# Altium PCB SW_SWITCHED_LPF_BANK.PcbDoc (part 2 of 2)
Units mm, origin at the board's own origin, x right, y up, seen from the top; angles counter-clockwise.
Board outline 151 x 125 mm, 2 copper layers (Top Layer, Bottom Layer), stack 1.576 mm thick; 115 components, 47 nets, 280 pads, 1853 vias.
Unrouted connection lines stored in the file: 42.
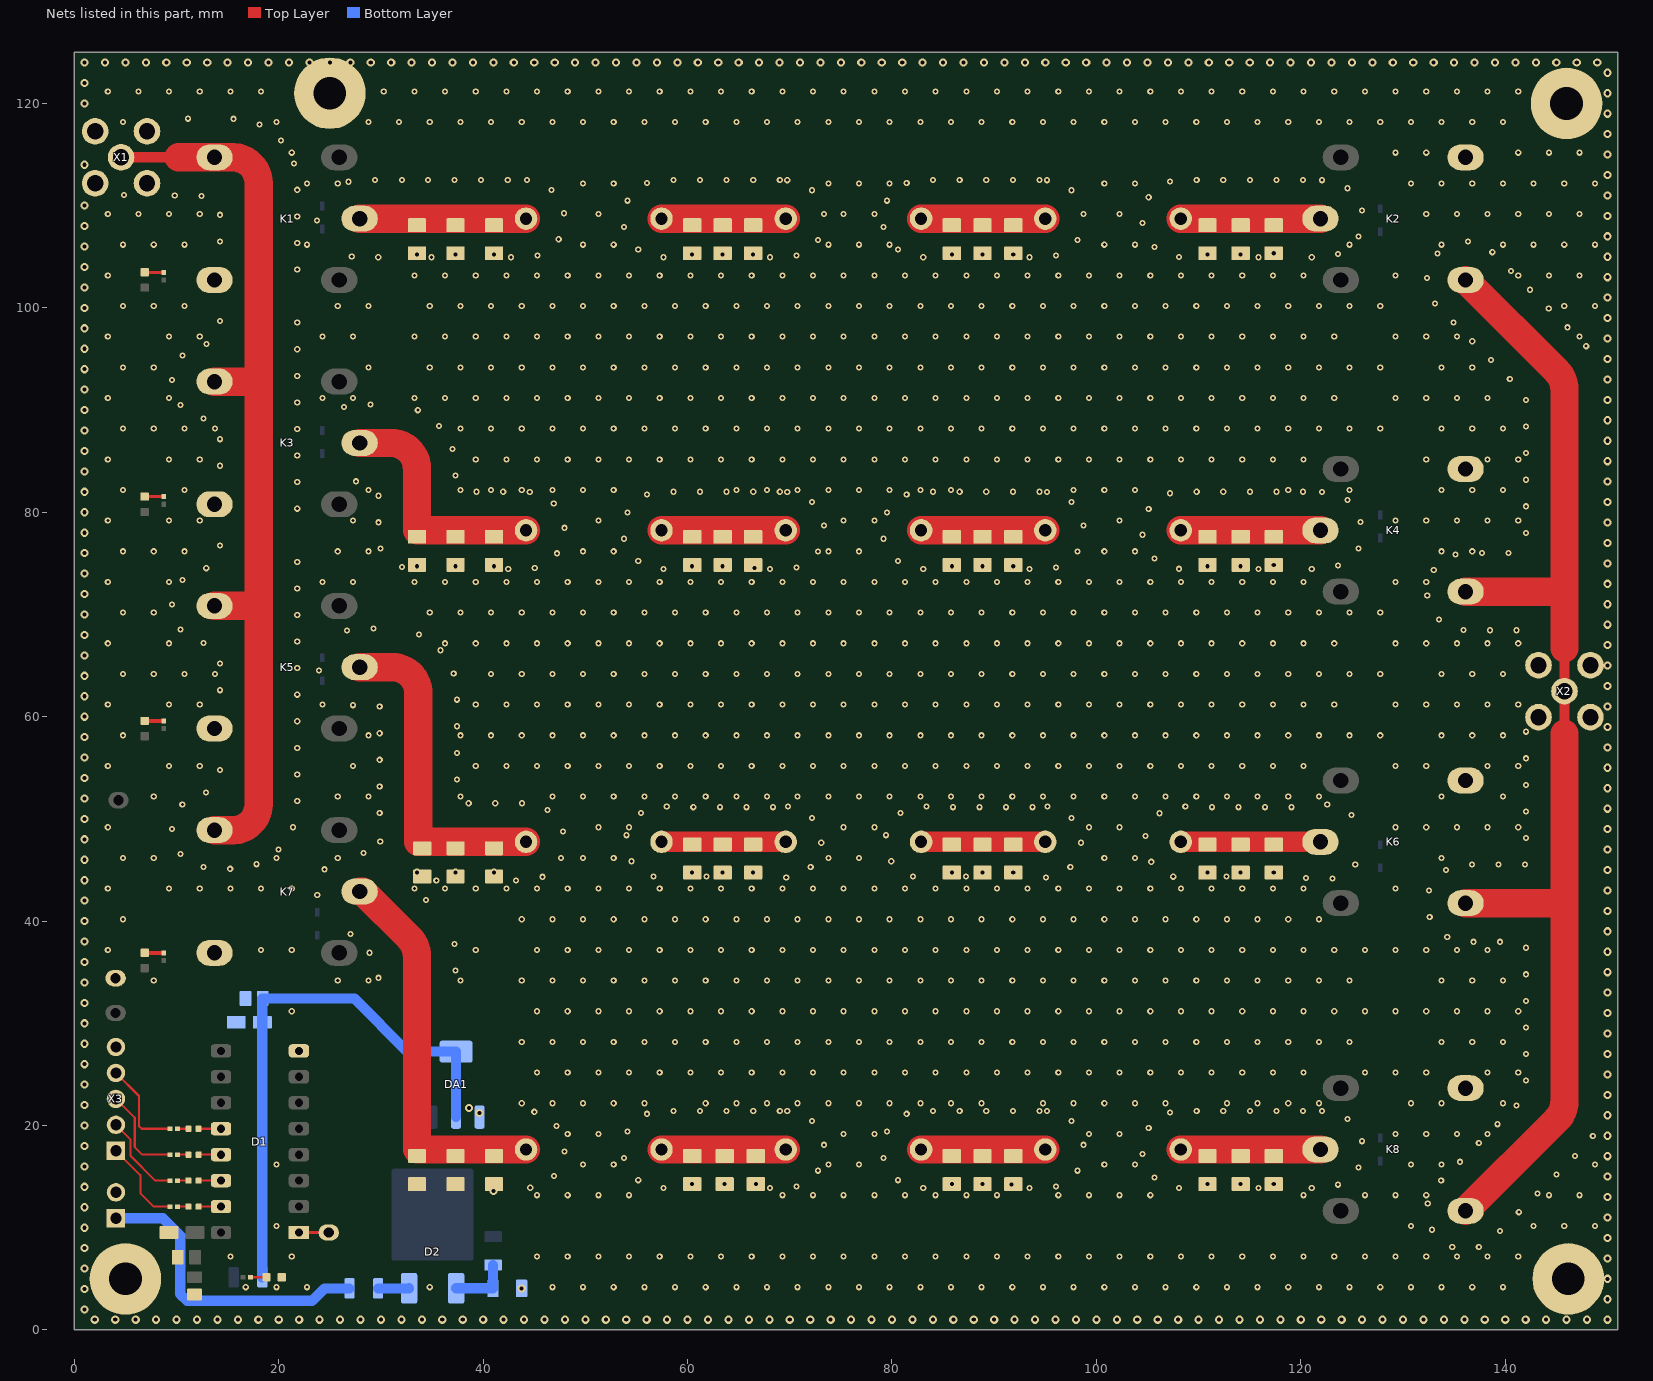
[diagram p2: the nets of this part, all layers, seen from the top]

## Via types
v1: diameter 0.6, hole 0.3, Top Layer to Bottom Layer, tented both sides, 1534 vias
v2: diameter 0.8, hole 0.4, Top Layer to Bottom Layer, tented both sides, 319 vias

## Nets (pads, with @x,y where several pads share a name; then routed paths per layer and width w, separated by ;. In a path a pad name is that pad's centre, name@x,y a point inside that pad or via, vN(x,y) a via of type N, cw(c..) or ccw(c..) an arc to the next point about the centre after c; other vN are vias at no path point) (continued)
GND: C1.2 C2.2 C3.2 C4.2 C5.2 C6.2 C7.2 C8.2 C9.2 C10.2 C11.2 C12.2 C13.2 C14.2 C15.2 C16.2 C17.2 C18.2 C19.2 C20.2 C21.2 C22.2 C23.2 C24.2 C25.2 C26.2 C27.2 C28.2 C29.2 C30.2 C31.2 C32.2 C33.2 C34.2 C35.2 C36.2 C37.2 C38.2 C39.2 C40.2 C41.2 C42.2 C43.2 C44.2 C45.2 C46.2 C47.2 C48.2 C49.2 C50.2 C51.2 C52.2 C53.2 C54.2 D1.8 DA1.1 FP6.1 HG5.CA K1.5 K2.5 K3.5 K4.5 K5.5 K6.5 K7.5 K8.5 pad.8 R6.2 X1.2 X2.2 X3.5 X4.2
  other v1: 16.772,4.18 19.772,4.18 22.772,4.18 34.772,4.18 46.772,4.18 49.772,4.18 52.772,4.18 55.772,4.18 58.772,4.18 61.772,4.18 64.772,4.18 67.772,4.18 70.772,4.18 73.772,4.18 76.772,4.18 79.772,4.18 82.772,4.18 85.772,4.18 88.772,4.18 91.772,4.18 94.772,4.18 97.772,4.18 100.772,4.18 103.772,4.18 106.772,4.18 109.772,4.18 112.772,4.18 115.772,4.18 118.772,4.18 121.772,4.18 124.772,4.18 127.772,4.18 130.772,4.18 133.772,4.18 136.772,4.18 139.772,4.18 15.272,7.18 21.272,7.18 45.272,7.18 48.272,7.18 51.272,7.18 54.272,7.18 57.272,7.18 60.272,7.18 63.272,7.18 66.272,7.18 69.272,7.18 72.272,7.18 75.272,7.18 78.272,7.18 81.272,7.18 84.272,7.18 87.272,7.18 90.272,7.18 93.272,7.18 96.272,7.18 99.272,7.18 102.272,7.18 105.272,7.18 108.272,7.18 111.272,7.18 114.272,7.18 117.272,7.18 120.272,7.18 123.272,7.18 126.272,7.18 129.272,7.18 132.272,7.18 135.272,7.18 138.272,7.18 141.272,7.18 137.415,8.112 134.815,8.117 139.49,9.679 132.835,9.803 19.772,10.18 130.772,10.18 142.772,10.18 145.772,10.18 148.772,10.18 141.328,11.518 132.42,12.37 45.272,13.18 48.272,13.18 51.272,13.18 54.272,13.18 69.272,13.18 72.272,13.18 75.272,13.18 78.272,13.18 81.272,13.18 84.272,13.18 87.272,13.18 90.272,13.18 96.272,13.18 99.272,13.18 102.272,13.18 105.272,13.18 120.272,13.18 126.272,13.18 129.272,13.18 132.272,13.18 144.272,13.18 147.272,13.18 143.167,13.356 57.658,13.875 68.058,13.875 83.058,13.875 93.458,13.875 115.869,13.875 121.069,13.875 108.069,13.891 44.61,13.908 70.653,14.032 96.053,14.032 123.647,14.208 133.736,14.612 55.176,14.649 80.576,14.649 105.671,14.895 46.94,15.063 145.005,15.195 72.743,15.579 98.143,15.579 125.63,15.89 19.772,16.18 49.772,16.18 52.772,16.18 73.772,16.18 76.772,16.18 100.772,16.18 103.772,16.18 130.772,16.18 133.772,16.18 148.772,16.18 135.574,16.451 53.763,16.831 79.163,16.831 146.844,17.033 104.506,17.22 47.962,17.453 73.335,18.111 98.735,18.111 137.413,18.289 125.997,18.464 148.568,18.979 48.272,19.18 51.272,19.18 75.272,19.18 78.272,19.18 99.272,19.18 102.272,19.18 129.272,19.18 132.272,19.18 135.272,19.18 138.272,19.18 54.105,19.408 79.505,19.408 105.116,19.748 47.192,19.936 139.251,20.127 72.156,20.429 97.556,20.429 124.552,20.626 56.039,21.146 81.439,21.146 107.216,21.28 45.003,21.34 69.751,21.416 95.151,21.416 122.075,21.416 58.623,21.431 61.223,21.431 63.823,21.431 66.423,21.431 69.023,21.431 84.023,21.431 86.623,21.431 89.223,21.431 91.823,21.431 94.423,21.431 109.812,21.431 112.412,21.431 115.012,21.431 117.612,21.431 120.212,21.431 141.089,21.966 43.772,22.18 46.772,22.18 49.772,22.18 52.772,22.18 55.772,22.18 61.772,22.18 64.772,22.18 67.772,22.18 70.772,22.18 73.772,22.18 76.772,22.18 79.772,22.18 82.772,22.18 85.772,22.18 88.772,22.18 94.772,22.18 97.772,22.18 100.772,22.18 103.772,22.18 106.772,22.18 112.772,22.18 115.772,22.18 118.772,22.18 121.772,22.18 130.772,22.18 133.772,22.18 139.772,22.18 142.018,24.395 45.272,25.18 48.272,25.18 51.272,25.18 54.272,25.18 57.272,25.18 60.272,25.18 63.272,25.18 66.272,25.18 69.272,25.18 72.272,25.18 75.272,25.18 78.272,25.18 81.272,25.18 84.272,25.18 87.272,25.18 90.272,25.18 93.272,25.18 96.272,25.18 99.272,25.18 102.272,25.18 105.272,25.18 108.272,25.18 111.272,25.18 114.272,25.18 117.272,25.18 120.272,25.18 126.272,25.18 129.272,25.18 132.272,25.18 138.272,25.18 141.272,25.18 142.018,26.995 43.772,28.18 46.772,28.18 49.772,28.18 52.772,28.18 55.772,28.18 58.772,28.18 61.772,28.18 64.772,28.18 67.772,28.18 70.772,28.18 73.772,28.18 76.772,28.18 79.772,28.18 82.772,28.18 85.772,28.18 88.772,28.18 91.772,28.18 94.772,28.18 97.772,28.18 100.772,28.18 103.772,28.18 106.772,28.18 109.772,28.18 112.772,28.18 115.772,28.18 118.772,28.18 121.772,28.18 124.772,28.18 133.772,28.18 136.772,28.18 139.772,28.18 142.018,29.595 21.272,31.18 45.272,31.18 48.272,31.18 51.272,31.18 54.272,31.18 57.272,31.18 60.272,31.18 63.272,31.18 66.272,31.18 69.272,31.18 72.272,31.18 75.272,31.18 78.272,31.18 81.272,31.18 84.272,31.18 87.272,31.18 90.272,31.18 93.272,31.18 96.272,31.18 99.272,31.18 102.272,31.18 105.272,31.18 108.272,31.18 111.272,31.18 114.272,31.18 117.272,31.18 120.272,31.18 123.272,31.18 126.272,31.18 129.272,31.18 132.272,31.18 135.272,31.18 138.272,31.18 141.272,31.18 142.018,32.195 7.772,34.18 25.772,34.18 28.772,34.18 37.772,34.18 43.772,34.18 46.772,34.18 49.772,34.18 52.772,34.18 55.772,34.18 58.772,34.18 61.772,34.18 64.772,34.18 67.772,34.18 70.772,34.18 73.772,34.18 76.772,34.18 79.772,34.18 82.772,34.18 85.772,34.18 88.772,34.18 91.772,34.18 94.772,34.18 97.772,34.18 100.772,34.18 103.772,34.18 106.772,34.18 109.772,34.18 112.772,34.18 115.772,34.18 118.772,34.18 121.772,34.18 124.772,34.18 133.772,34.18 136.772,34.18 139.772,34.18 29.75,34.452 142.018,34.795 37.306,35.152 28.876,36.901 3.272,37.18 18.272,37.18 21.272,37.18 39.272,37.18 45.272,37.18 48.272,37.18 51.272,37.18 54.272,37.18 57.272,37.18 60.272,37.18 63.272,37.18 66.272,37.18 69.272,37.18 72.272,37.18 75.272,37.18 78.272,37.18 81.272,37.18 84.272,37.18 87.272,37.18 90.272,37.18 93.272,37.18 96.272,37.18 99.272,37.18 102.272,37.18 105.272,37.18 108.272,37.18 111.272,37.18 114.272,37.18 117.272,37.18 120.272,37.18 123.272,37.18 126.272,37.18 129.272,37.18 132.272,37.18 135.272,37.18 138.272,37.18 142.018,37.395 37.183,37.749 136.883,37.974 139.483,37.974 134.324,38.434 27.037,38.739 4.772,40.18 43.772,40.18 46.772,40.18 49.772,40.18 52.772,40.18 55.772,40.18 58.772,40.18 61.772,40.18 64.772,40.18 67.772,40.18 70.772,40.18 73.772,40.18 76.772,40.18 79.772,40.18 82.772,40.18 85.772,40.18 88.772,40.18 91.772,40.18 94.772,40.18 97.772,40.18 100.772,40.18 103.772,40.18 106.772,40.18 109.772,40.18 112.772,40.18 115.772,40.18 118.772,40.18 121.772,40.18 132.608,40.388 34.408,42.055 23.768,42.566 132.559,42.987 3.272,43.18 9.272,43.18 12.272,43.18 15.272,43.18 18.272,43.18 21.272,43.18 33.272,43.18 36.272,43.18 39.272,43.18 42.272,43.18 45.272,43.18 48.272,43.18 51.272,43.18 54.272,43.18 57.272,43.18 60.272,43.18 63.272,43.18 66.272,43.18 69.272,43.18 72.272,43.18 75.272,43.18 78.272,43.18 81.272,43.18 84.272,43.18 87.272,43.18 90.272,43.18 93.272,43.18 96.272,43.18 99.272,43.18 102.272,43.18 105.272,43.18 108.272,43.18 111.272,43.18 114.272,43.18 117.272,43.18 120.272,43.18 129.272,43.18 35.413,43.974 43.213,43.974 123.111,44.163 120.512,44.211 69.651,44.269 95.051,44.269 45.788,44.335 56.652,44.358 82.052,44.358 107.516,44.343 61.852,44.362 87.252,44.362 112.716,44.362 134.206,44.999 24.473,45.068 15.249,45.117 12.654,45.276 72.047,45.279 97.447,45.279 125.324,45.528 136.751,45.53 139.351,45.53 141.951,45.53 17.809,45.568 105.364,45.802 54.525,45.852 79.925,45.852 4.772,46.18 7.772,46.18 19.772,46.18 25.772,46.18 47.621,46.179 49.772,46.18 52.772,46.18 73.772,46.18 76.772,46.18 100.772,46.18 103.772,46.18 133.772,46.18 10.395,46.563 28.303,46.666 19.98,46.999 73.08,47.665 98.48,47.665 29.927,47.802 142.018,48.13 104.814,48.343 54.028,48.405 79.428,48.405 47.826,48.771 9.552,49.023 3.272,49.18 21.388,49.185 51.272,49.18 54.272,49.18 75.272,49.18 78.272,49.18 99.272,49.18 102.272,49.18 129.272,49.18 132.272,49.18 135.272,49.18 138.272,49.18 141.272,49.18 72.174,50.103 97.574,50.103 124.973,50.375 106.182,50.555 29.877,50.58 55.432,50.593 80.832,50.593 142.018,50.73 46.302,50.877 60.56,51.142 63.16,51.142 65.76,51.142 68.36,51.142 85.96,51.142 88.56,51.142 91.16,51.142 93.76,51.142 111.298,51.142 113.898,51.142 116.498,51.142 119.098,51.142 57.961,51.196 83.361,51.196 108.699,51.204 69.829,51.225 95.229,51.225 10.562,51.418 122.583,51.399 38.585,51.53 41.185,51.53 43.785,51.53 21.812,51.75 7.772,52.18 25.772,52.18 28.772,52.18 37.772,52.18 46.772,52.18 49.772,52.18 52.772,52.18 55.772,52.18 58.772,52.18 61.772,52.18 64.772,52.18 67.772,52.18 70.772,52.18 73.772,52.18 76.772,52.18 79.772,52.18 82.772,52.18 85.772,52.18 88.772,52.18 91.772,52.18 94.772,52.18 97.772,52.18 100.772,52.18 103.772,52.18 106.772,52.18 109.772,52.18 112.772,52.18 115.772,52.18 118.772,52.18 121.772,52.18 133.772,52.18 139.772,52.18 12.888,52.58 29.877,53.18 142.018,53.33 37.433,53.861 21.812,54.35 14.256,54.791 3.272,55.18 9.272,55.18 12.272,55.18 27.272,55.18 39.272,55.18 42.272,55.18 45.272,55.18 48.272,55.18 51.272,55.18 54.272,55.18 57.272,55.18 60.272,55.18 63.272,55.18 66.272,55.18 69.272,55.18 72.272,55.18 75.272,55.18 78.272,55.18 81.272,55.18 84.272,55.18 87.272,55.18 90.272,55.18 93.272,55.18 96.272,55.18 99.272,55.18 102.272,55.18 105.272,55.18 108.272,55.18 111.272,55.18 114.272,55.18 117.272,55.18 120.272,55.18 129.272,55.18 132.272,55.18 138.272,55.18 141.272,55.18 29.877,55.78 142.018,55.93 37.433,56.461 21.812,56.95 4.772,58.18 28.772,58.18 37.772,58.18 40.772,58.18 43.772,58.18 46.772,58.18 49.772,58.18 52.772,58.18 55.772,58.18 58.772,58.18 61.772,58.18 64.772,58.18 67.772,58.18 70.772,58.18 73.772,58.18 76.772,58.18 79.772,58.18 82.772,58.18 85.772,58.18 88.772,58.18 91.772,58.18 94.772,58.18 97.772,58.18 100.772,58.18 103.772,58.18 106.772,58.18 109.772,58.18 112.772,58.18 115.772,58.18 118.772,58.18 121.772,58.18 124.772,58.18 127.772,58.18 133.772,58.18 136.772,58.18 139.772,58.18 29.877,58.38 142.034,58.53 37.433,59.061 21.812,59.55 29.877,60.98 27.281,61.124 3.272,61.18 9.272,61.18 12.272,61.18 24.272,61.18 39.272,61.18 42.272,61.18 45.272,61.18 48.272,61.18 51.272,61.18 54.272,61.18 57.272,61.18 60.272,61.18 63.272,61.18 66.272,61.18 69.272,61.18 72.272,61.18 75.272,61.18 78.272,61.18 81.272,61.18 84.272,61.18 87.272,61.18 90.272,61.18 93.272,61.18 96.272,61.18 99.272,61.18 102.272,61.18 105.272,61.18 108.272,61.18 111.272,61.18 114.272,61.18 117.272,61.18 120.272,61.18 123.272,61.18 129.272,61.18 132.272,61.18 135.272,61.18 138.272,61.18 141.272,61.18 37.433,61.661 21.812,62.15 14.256,62.591 4.772,64.18 7.772,64.18 10.772,64.18 13.772,64.18 40.772,64.18 43.772,64.18 46.772,64.18 49.772,64.18 52.772,64.18 55.772,64.18 58.772,64.18 61.772,64.18 64.772,64.18 67.772,64.18 70.772,64.18 73.772,64.18 76.772,64.18 79.772,64.18 82.772,64.18 85.772,64.18 88.772,64.18 91.772,64.18 94.772,64.18 97.772,64.18 100.772,64.18 103.772,64.18 106.772,64.18 109.772,64.18 112.772,64.18 115.772,64.18 118.772,64.18 121.772,64.18 124.772,64.18 127.772,64.18 133.772,64.18 136.772,64.18 139.772,64.18 37.116,64.242 23.946,64.514 21.812,64.75 14.256,65.191 35.823,66.498 3.272,67.18 9.272,67.18 36.272,67.18 39.272,67.18 42.272,67.18 45.272,67.18 48.272,67.18 51.272,67.18 54.272,67.18 57.272,67.18 60.272,67.18 63.272,67.18 66.272,67.18 69.272,67.18 72.272,67.18 75.272,67.18 78.272,67.18 81.272,67.18 84.272,67.18 87.272,67.18 90.272,67.18 93.272,67.18 96.272,67.18 99.272,67.18 102.272,67.18 105.272,67.18 108.272,67.18 111.272,67.18 114.272,67.18 117.272,67.18 120.272,67.18 123.272,67.18 129.272,67.18 132.272,67.18 135.272,67.18 138.272,67.18 141.272,67.18 12.635,67.224 21.812,67.35 33.731,68.042 26.665,68.418 138.5,68.454 141.1,68.454 135.9,68.471 10.383,68.523 29.258,68.618 133.514,69.504 21.812,69.95 4.772,70.18 7.772,70.18 34.772,70.18 37.772,70.18 40.772,70.18 43.772,70.18 46.772,70.18 49.772,70.18 52.772,70.18 55.772,70.18 58.772,70.18 61.772,70.18 64.772,70.18 67.772,70.18 70.772,70.18 73.772,70.18 76.772,70.18 79.772,70.18 82.772,70.18 85.772,70.18 88.772,70.18 91.772,70.18 94.772,70.18 97.772,70.18 100.772,70.18 103.772,70.18 106.772,70.18 109.772,70.18 112.772,70.18 115.772,70.18 118.772,70.18 121.772,70.18 124.772,70.18 127.772,70.18 9.551,70.987 132.373,71.84 21.812,72.55 3.272,73.18 9.272,73.18 24.272,73.18 27.272,73.18 33.272,73.18 36.272,73.18 39.272,73.18 42.272,73.18 45.272,73.18 48.272,73.18 51.272,73.18 54.272,73.18 57.272,73.18 60.272,73.18 63.272,73.18 66.272,73.18 69.272,73.18 72.272,73.18 75.272,73.18 78.272,73.18 81.272,73.18 84.272,73.18 87.272,73.18 90.272,73.18 93.272,73.18 96.272,73.18 99.272,73.18 102.272,73.18 105.272,73.18 108.272,73.18 111.272,73.18 114.272,73.18 117.272,73.18 120.272,73.18 129.272,73.18 132.272,73.18 10.576,73.376 133.009,74.361 42.451,74.454 57.658,74.454 68.058,74.454 83.058,74.454 93.458,74.454 115.869,74.454 121.069,74.454 108.069,74.47 12.908,74.526 45.049,74.555 70.653,74.611 96.053,74.611 32.058,74.641 123.647,74.787 21.812,75.15 55.176,75.228 80.576,75.228 105.671,75.474 135.128,75.868 47.22,75.986 137.724,76.01 140.324,76.01 72.743,76.158 98.143,76.158 4.772,76.18 7.772,76.18 10.772,76.18 25.772,76.18 28.772,76.18 49.772,76.18 52.772,76.18 73.772,76.18 76.772,76.18 100.772,76.18 103.772,76.18 133.772,76.18 136.772,76.18 29.943,76.456 125.63,76.469 14.256,76.75 53.763,77.41 79.163,77.41 104.506,77.799 142.018,77.983 47.956,78.48 73.335,78.69 98.735,78.69 29.75,79.017 125.844,79.043 3.272,79.18 9.272,79.18 12.272,79.18 27.272,79.18 51.272,79.18 75.272,79.18 78.272,79.18 102.272,79.18 129.272,79.18 132.272,79.18 135.272,79.18 138.272,79.18 141.272,79.18 54.105,79.987 79.505,79.987 105.116,80.327 21.812,80.35 142.018,80.583 46.903,80.857 72.156,81.008 97.556,81.008 124.552,81.205 29.75,81.617 56.039,81.725 81.439,81.725 107.216,81.859 44.559,81.983 69.751,81.995 95.151,81.995 122.075,81.995 39.359,82.01 41.959,82.01 58.623,82.01 61.223,82.01 63.823,82.01 66.423,82.01 69.023,82.01 84.023,82.01 86.623,82.01 89.223,82.01 91.823,82.01 94.423,82.01 109.812,82.01 112.412,82.01 115.012,82.01 117.612,82.01 120.212,82.01 4.772,82.18 10.772,82.18 28.772,82.18 37.772,82.18 40.772,82.18 43.772,82.18 46.772,82.18 49.772,82.18 52.772,82.18 64.772,82.18 67.772,82.18 70.772,82.18 73.772,82.18 76.772,82.18 79.772,82.18 82.772,82.18 85.772,82.18 97.772,82.18 100.772,82.18 103.772,82.18 118.772,82.18 124.772,82.18 133.772,82.18 136.772,82.18 139.772,82.18 21.812,82.95 27.567,83.031 142.018,83.183 37.306,83.606 14.256,84.55 3.272,85.18 9.272,85.18 12.272,85.18 39.272,85.18 42.272,85.18 45.272,85.18 48.272,85.18 51.272,85.18 54.272,85.18 57.272,85.18 60.272,85.18 63.272,85.18 66.272,85.18 69.272,85.18 72.272,85.18 75.272,85.18 78.272,85.18 81.272,85.18 84.272,85.18 87.272,85.18 90.272,85.18 93.272,85.18 96.272,85.18 99.272,85.18 102.272,85.18 105.272,85.18 108.272,85.18 111.272,85.18 114.272,85.18 117.272,85.18 120.272,85.18 132.272,85.18 138.272,85.18 141.272,85.18 21.812,85.55 142.018,85.783 36.989,86.186 14.256,87.15 21.812,88.15 4.772,88.18 7.772,88.18 10.772,88.18 13.772,88.18 37.772,88.18 40.772,88.18 43.772,88.18 46.772,88.18 49.772,88.18 52.772,88.18 55.772,88.18 58.772,88.18 61.772,88.18 64.772,88.18 67.772,88.18 70.772,88.18 73.772,88.18 76.772,88.18 79.772,88.18 82.772,88.18 85.772,88.18 88.772,88.18 91.772,88.18 94.772,88.18 97.772,88.18 100.772,88.18 103.772,88.18 106.772,88.18 109.772,88.18 112.772,88.18 115.772,88.18 118.772,88.18 121.772,88.18 124.772,88.18 127.772,88.18 133.772,88.18 136.772,88.18 139.772,88.18 142.018,88.383 35.696,88.442 12.621,89.172 33.604,89.986 26.377,90.291 10.374,90.479 28.963,90.562 21.812,90.75 142.018,90.983 3.272,91.18 9.272,91.18 24.272,91.18 27.272,91.18 33.272,91.18 36.272,91.18 39.272,91.18 42.272,91.18 45.272,91.18 48.272,91.18 51.272,91.18 54.272,91.18 57.272,91.18 60.272,91.18 63.272,91.18 66.272,91.18 69.272,91.18 72.272,91.18 75.272,91.18 78.272,91.18 81.272,91.18 84.272,91.18 87.272,91.18 90.272,91.18 93.272,91.18 96.272,91.18 99.272,91.18 102.272,91.18 105.272,91.18 108.272,91.18 111.272,91.18 114.272,91.18 117.272,91.18 120.272,91.18 123.272,91.18 129.272,91.18 132.272,91.18 135.272,91.18 138.272,91.18 9.552,92.946 140.448,93.056 21.812,93.35 4.772,94.18 7.772,94.18 28.772,94.18 34.772,94.18 37.772,94.18 40.772,94.18 43.772,94.18 46.772,94.18 49.772,94.18 52.772,94.18 55.772,94.18 58.772,94.18 61.772,94.18 64.772,94.18 67.772,94.18 70.772,94.18 73.772,94.18 76.772,94.18 79.772,94.18 82.772,94.18 85.772,94.18 88.772,94.18 91.772,94.18 94.772,94.18 97.772,94.18 100.772,94.18 103.772,94.18 106.772,94.18 109.772,94.18 112.772,94.18 115.772,94.18 118.772,94.18 121.772,94.18 124.772,94.18 127.772,94.18 133.772,94.18 136.772,94.18 138.61,94.895 10.587,95.331 21.812,95.95 147.921,96.248 12.923,96.472 136.771,96.733 3.272,97.18 9.272,97.18 12.272,97.18 24.272,97.18 27.272,97.18 33.272,97.18 36.272,97.18 39.272,97.18 42.272,97.18 45.272,97.18 48.272,97.18 51.272,97.18 54.272,97.18 57.272,97.18 60.272,97.18 63.272,97.18 66.272,97.18 69.272,97.18 72.272,97.18 75.272,97.18 78.272,97.18 81.272,97.18 84.272,97.18 87.272,97.18 90.272,97.18 93.272,97.18 96.272,97.18 99.272,97.18 102.272,97.18 105.272,97.18 108.272,97.18 111.272,97.18 114.272,97.18 117.272,97.18 120.272,97.18 123.272,97.18 129.272,97.18 132.272,97.18 135.272,97.18 147.272,97.18 146.094,98.098 21.812,98.55 134.933,98.572 14.256,98.705 144.255,99.936 4.772,100.18 7.772,100.18 10.772,100.18 25.772,100.18 28.772,100.18 34.772,100.18 37.772,100.18 40.772,100.18 43.772,100.18 46.772,100.18 49.772,100.18 52.772,100.18 55.772,100.18 58.772,100.18 61.772,100.18 64.772,100.18 67.772,100.18 70.772,100.18 73.772,100.18 76.772,100.18 79.772,100.18 82.772,100.18 85.772,100.18 88.772,100.18 91.772,100.18 94.772,100.18 97.772,100.18 100.772,100.18 103.772,100.18 106.772,100.18 109.772,100.18 112.772,100.18 115.772,100.18 118.772,100.18 121.772,100.18 124.772,100.18 127.772,100.18 145.772,100.18 148.772,100.18 133.127,100.442 142.417,101.775 132.353,102.924 3.272,103.18 33.272,103.18 36.272,103.18 39.272,103.18 42.272,103.18 45.272,103.18 48.272,103.18 51.272,103.18 54.272,103.18 57.272,103.18 60.272,103.18 63.272,103.18 66.272,103.18 69.272,103.18 72.272,103.18 75.272,103.18 78.272,103.18 81.272,103.18 84.272,103.18 87.272,103.18 90.272,103.18 93.272,103.18 96.272,103.18 99.272,103.18 102.272,103.18 105.272,103.18 108.272,103.18 111.272,103.18 114.272,103.18 117.272,103.18 120.272,103.18 129.272,103.18 141.272,103.18 144.272,103.18 147.272,103.18 140.578,103.613 21.812,103.75 29.737,104.95 34.937,104.95 42.737,104.95 57.658,104.95 68.058,104.95 83.058,104.95 93.458,104.95 108.069,104.966 115.869,104.95 121.069,104.95 27.139,105.038 70.653,105.107 96.053,105.107 45.331,105.127 123.647,105.283 133.373,105.316 138.735,105.446 55.176,105.724 80.576,105.724 105.671,105.97 4.772,106.18 7.772,106.18 10.772,106.18 22.772,106.18 49.772,106.18 52.772,106.18 73.772,106.18 76.772,106.18 79.772,106.18 100.772,106.18 103.772,106.18 124.772,106.18 133.772,106.18 139.772,106.18 142.772,106.18 145.772,106.18 148.772,106.18 21.812,106.35 136.353,106.489 14.256,106.505 72.743,106.654 98.143,106.654 47.39,106.715 125.63,106.965 53.763,107.906 79.163,107.906 104.506,108.295 23.754,108.552 21.812,108.95 14.256,109.105 3.272,109.18 6.272,109.18 9.272,109.18 12.272,109.18 51.272,109.18 75.272,109.18 78.272,109.18 102.272,109.18 132.272,109.18 135.272,109.18 138.272,109.18 141.272,109.18 144.272,109.18 147.272,109.18 73.335,109.186 98.735,109.186 47.925,109.259 125.997,109.539 54.105,110.483 79.505,110.483 105.116,110.823 12.423,110.95 9.824,110.98 4.869,111.055 72.156,111.504 97.556,111.504 21.812,111.55 46.694,111.549 124.552,111.701 22.772,112.18 25.772,112.18 49.772,112.18 52.772,112.18 73.772,112.18 76.772,112.18 79.772,112.18 100.772,112.18 103.772,112.18 130.772,112.18 133.772,112.18 136.772,112.18 139.772,112.18 142.772,112.18 145.772,112.18 148.772,112.18 56.039,112.221 81.439,112.221 26.808,112.337 107.216,112.355 29.403,112.506 32.054,112.506 34.603,112.506 37.203,112.506 39.803,112.506 42.403,112.506 44.274,112.499 58.623,112.506 61.223,112.506 63.823,112.506 66.423,112.506 69.023,112.506 69.751,112.491 84.023,112.506 86.623,112.506 89.223,112.506 91.823,112.506 94.423,112.506 95.151,112.491 109.812,112.506 112.412,112.506 115.012,112.506 117.612,112.506 120.212,112.506 122.075,112.491 21.495,114.131 21.272,115.18 129.272,115.18 132.272,115.18 141.272,115.18 144.272,115.18 147.272,115.18 20.202,116.386 18.11,117.93 4.772,118.18 19.772,118.18 28.772,118.18 31.772,118.18 34.772,118.18 37.772,118.18 40.772,118.18 43.772,118.18 46.772,118.18 49.772,118.18 52.772,118.18 55.772,118.18 58.772,118.18 61.772,118.18 64.772,118.18 67.772,118.18 70.772,118.18 73.772,118.18 76.772,118.18 79.772,118.18 82.772,118.18 85.772,118.18 88.772,118.18 91.772,118.18 94.772,118.18 97.772,118.18 100.772,118.18 103.772,118.18 106.772,118.18 109.772,118.18 112.772,118.18 115.772,118.18 118.772,118.18 121.772,118.18 124.772,118.18 127.772,118.18 130.772,118.18 133.772,118.18 136.772,118.18 139.772,118.18 15.573,118.499 11.122,118.506 3.272,121.18 6.272,121.18 9.272,121.18 12.272,121.18 15.272,121.18 18.272,121.18 30.272,121.18 33.272,121.18 36.272,121.18 39.272,121.18 42.272,121.18 45.272,121.18 48.272,121.18 51.272,121.18 54.272,121.18 57.272,121.18 60.272,121.18 63.272,121.18 66.272,121.18 69.272,121.18 72.272,121.18 75.272,121.18 78.272,121.18 81.272,121.18 84.272,121.18 87.272,121.18 90.272,121.18 93.272,121.18 96.272,121.18 99.272,121.18 102.272,121.18 105.272,121.18 108.272,121.18 111.272,121.18 114.272,121.18 117.272,121.18 120.272,121.18 123.272,121.18 126.272,121.18 129.272,121.18 132.272,121.18 135.272,121.18 138.272,121.18 141.272,121.18
  other v2: 2,1 4,1 6,1 8,1 10,1 12,1 14,1 16,1 18,1 20,1 22,1 24,1 26,1 28,1 30,1 32,1 34,1 36,1 38,1 40,1 42,1 44,1 46,1 48,1 50,1 52,1 54,1 56,1 58,1 60,1 62,1 64,1 66,1 68,1 70,1 72,1 74,1 76,1 78,1 80,1 82,1 84,1 86,1 88,1 90,1 92,1 94,1 96,1 98,1 100,1 102,1 104,1 106,1 108,1 110,1 112,1 114,1 116,1 118,1 120,1 122,1 124,1 126,1 128,1 130,1 132,1 134,1 136,1 138,1 140,1 142,1 144,1 146,1 148,1 150,1 1,2 150,3 1,4 43.767,4.064 150,5 1,6 150,7 1,8 150,9 1,10 150,11 1,12 150,13 41.021,13.589 1,14 91.694,14.224 60.452,14.268 63.627,14.268 66.675,14.268 85.852,14.268 88.858,14.268 110.872,14.268 114.11,14.268 117.348,14.268 150,15 1,16 150,17 1,18 150,19 1,20 150,21 39.624,21.209 38.608,21.717 1,22 150,23 1,24 150,25 1,26 150,27 1,28 150,29 1,30 150,31 1,32 150,33 1,34 150,35 1,36 150,37 1,38 150,39 1,40 150,41 1,42 150,43 1,44 33.528,44.748 37.296,44.748 41.064,44.748 60.452,44.748 63.43,44.748 66.408,44.748 85.852,44.748 88.858,44.748 91.864,44.748 110.872,44.748 114.11,44.748 117.348,44.748 150,45 1,46 150,47 1,48 150,49 1,50 150,51 1,52 150,53 1,54 150,55 1,56 150,57 1,58 150,59 1,60 150,61 1,62 150,63 1,64 150,65 1,66 150,67 1,68 150,69 1,70 150,71 1,72 150,73 1,74 66.548,74.549 33.528,74.72 37.296,74.72 41.064,74.72 60.452,74.72 63.43,74.72 85.852,74.72 88.858,74.72 91.864,74.72 110.872,74.72 114.11,74.72 117.348,74.847 150,75 1,76 150,77 1,78 150,79 1,80 150,81 1,82 150,83 1,84 150,85 1,86 150,87 1,88 150,89 1,90 150,91 1,92 150,93 1,94 150,95 1,96 150,97 1,98 150,99 1,100 150,101 1,102 150,103 1,104 150,105 33.528,105.216 37.296,105.216 41.064,105.216 60.452,105.216 63.43,105.216 66.408,105.216 85.852,105.216 88.858,105.216 91.864,105.216 110.872,105.216 114.11,105.216 117.348,105.343 1,106 150,107 1,108 150,109 1,110 150,111 150,113 1,114 150,115 150,117 150,119 1,120 150,121 1,122 150,123 1,124 3,124 5,124 7,124 9,124 11,124 13,124 15,124 17,124 19,124 21,124 23,124 25,124 27,124 29,124 31,124 33,124 35,124 37,124 39,124 41,124 43,124 45,124 47,124 49,124 51,124 53,124 55,124 57,124 59,124 61,124 63,124 65,124 67,124 69,124 71,124 73,124 75,124 77,124 79,124 81,124 83,124 85,124 87,124 89,124 91,124 93,124 95,124 97,124 99,124 101,124 103,124 105,124 107,124 109,124 111,124 113,124 115,124 117,124 119,124 121,124 123,124 125,124 127,124 129,124 131,124 133,124 135,124 137,124 139,124 141,124 143,124 145,124 147,124 149,124
NetC1_1: C1.1 C2.1 C3.1 K1.4 L1.2 | length 16.3
  Top Layer w2.77: K1.4@27.916,108.728 L1.2@44.196,108.728
NetC4_1: C4.1 C5.1 C6.1 L1.1 L2.2 | length 12.1
  Top Layer w2.77: L1.1@57.448,108.728 L2.2@69.596,108.728
NetC7_1: C7.1 C8.1 C9.1 L2.1 L3.2 | length 12.1
  Top Layer w2.77: L2.1@82.848,108.728 L3.2@94.996,108.728
NetC10_1: C10.1 C11.1 C12.1 K2.4 L3.1 | length 13.7
  Top Layer w2.77: L3.1@108.248,108.728 K2.4@121.92,108.728
NetC13_1: C13.1 C14.1 C15.1 K3.4 L4.2 | length 23.7
  Top Layer w2.77: K3.4@27.916,86.784 30.988,86.784 cw(c30.988,84.244) 33.528,84.244 33.528,78.232 L4.2@44.196,78.232
NetC16_1: C16.1 C17.1 C18.1 L4.1 L5.2 | length 12.1
  Top Layer w2.77: L4.1@57.448,78.232 L5.2@69.596,78.232
NetC19_1: C19.1 C20.1 C21.1 L5.1 L6.2 | length 12.1
  Top Layer w2.77: L5.1@82.848,78.232 L6.2@94.996,78.232
NetC22_1: C22.1 C23.1 C24.1 K4.4 L6.1 | length 13.7
  Top Layer w2.77: L6.1@108.248,78.232 110.872,78.232 114.11,78.232 117.348,78.232 K4.4@121.92,78.232
NetC25_1: C25.1 C26.1 C27.1 K5.4 L7.2 | length 32.3
  Top Layer w2.77: K5.4@27.916,64.839 28.278,64.839 31.115,64.839 cw(c31.115,62.299) 33.655,62.299 33.655,47.752 37.296,47.752 41.064,47.752 L7.2@44.196,47.752
NetC28_1: C28.1 C29.1 C30.1 L7.1 L8.2 | length 12.1
  Top Layer w2: L7.1@57.448,47.752 60.452,47.752 63.43,47.752 66.408,47.752 L8.2@69.596,47.752
NetC31_1: C31.1 C32.1 C33.1 L8.1 L9.2 | length 12.1
  Top Layer w2: L8.1@82.848,47.752 L9.2@94.996,47.752
NetC34_1: C34.1 C35.1 C36.1 K6.4 L9.1 | length 13.7
  Top Layer w2: L9.1@108.248,47.752 K6.4@121.92,47.752
NetC37_1: C37.1 C38.1 C39.1 K7.4 L10.2 | length 38.3
  Top Layer w2.77: K7.4@27.916,42.895 28.225,42.895 32.784,38.336 cw(c30.988,36.54) 33.528,36.54 33.528,17.653 L10.2@44.196,17.653
NetC40_1: C40.1 C41.1 C42.1 L10.1 L11.2 | length 12.1
  Top Layer w2.77: L10.1@57.448,17.653 60.452,17.653 63.627,17.653 66.675,17.653 L11.2@69.596,17.653
NetC43_1: C43.1 C44.1 C45.1 L11.1 L12.2 | length 12.1
  Top Layer w2.77: L11.1@82.848,17.653 85.852,17.653 88.858,17.653 91.864,17.653 L12.2@94.996,17.653
NetC46_1: C46.1 C47.1 C48.1 K8.4 L12.1 | length 13.7
  Top Layer w2.77: L12.1@108.248,17.653 K8.4@121.92,17.653
NetC51_1: C51.1 C53.1 DA1.2 DA1.4 L14.1 | length 54.8
  Bottom Layer w1: L14.1@18.395,5.156 C51.1@18.395,30.099 18.395,32.436 C53.1@18.44,32.436 27.381,32.436 32.589,27.228 DA1.4@37.352,27.228 DA1.2@37.352,20.828
NetD1_1: D1.1 FP1.1 | length 2.9
  Top Layer w0.3: D1.1@21.971,9.525 FP1.1@24.892,9.525
NetD1_12: D1.12 L18.2 | length 2.2
  Top Layer w0.2: L18.2@12.159,19.685 D1.12@14.351,19.685
NetD1_13: D1.13 L17.2 | length 2.2
  Top Layer w0.2: L17.2@12.159,17.145 D1.13@14.351,17.145
NetD1_14: D1.14 L16.2 | length 2.2
  Top Layer w0.2: L16.2@12.159,14.605 D1.14@14.351,14.605
NetD1_15: D1.15 L15.2 | length 2.2
  Top Layer w0.2: L15.2@12.159,12.065 D1.15@14.351,12.065
NetD2_1: D2.1 R5.2 R6.1 | length 5.9
  Bottom Layer w1: D2.1@37.352,4.071 40.967,4.071 R5.2@40.967,6.347
NetD2_3: D2.3 L13.2 | length 3
  Bottom Layer w1: L13.2@29.721,4.064 32.745,4.064 D2.3@32.752,4.071
NetHG1_CA: HG1.CA R1.2 | length 1.9
  Top Layer w0.3: HG1.CA@6.883,103.478 R1.2@8.763,103.478
NetHG2_CA: HG2.CA R2.2 | length 1.9
  Top Layer w0.3: HG2.CA@6.883,81.534 R2.2@8.763,81.534
NetHG3_CA: HG3.CA R3.2 | length 1.9
  Top Layer w0.4: HG3.CA@6.883,59.589 R3.2@8.763,59.589
NetHG4_CA: HG4.CA R4.2 | length 1.9
  Top Layer w0.4: HG4.CA@6.883,36.895 R4.2@8.763,36.895
NetHG5_AN: HG5.AN R7.2 | length 1.6
  Top Layer w0.25: R7.2@17.241,5.156 HG5.AN@18.796,5.156
NetK1_3: K1.3 K3.3 K5.3 K7.3 X1.1 | length 90.1
  Top Layer w1: X1.1@4.572,114.728 10.207,114.728
  Top Layer w2.77: 10.207,114.728 K1.3@13.716,114.728 15.494,114.728 cw(c15.494,112.188) 18.034,112.188 18.034,92.837 ; K7.3@13.716,48.895 15.494,48.895 ccw(c15.494,51.435) 18.034,51.435 18.034,70.866 ; K5.3@13.716,70.839 18.007,70.839 ccw(c18.007,70.866) 18.034,70.866 ; K3.3@13.716,92.784 17.981,92.784 ccw(c17.981,92.837) 18.034,92.837 ; 18.034,70.866 18.034,92.837
NetK2_3: K2.3 K4.3 K6.3 K8.3 X2.1 | length 118.3
  Top Layer w1: 145.796,58.325 X2.1@145.796,62.5 145.796,66.675
  Top Layer w2.77: K8.3@136.12,11.653 145.052,20.585 ccw(c143.256,22.381) 145.796,22.381 145.796,41.529 ; K6.3@136.12,41.752 145.258,41.752 cw(c145.258,40.991) 145.796,41.529 ; K4.3@136.12,72.232 145.721,72.232 ccw(c145.721,72.338) 145.796,72.263 ; K2.3@136.12,102.728 145.052,93.796 cw(c143.256,92) 145.796,92 145.796,72.263 ; 145.796,58.325 145.796,41.529 ; 145.796,66.675 145.796,72.263
NetL13_1: L13.1 X4.1 | length 30.1
  Bottom Layer w1: X4.1@4.064,10.922 8.661,10.922 10.363,9.22 10.363,3.505 11.024,2.845 23.266,2.845 24.486,4.064 L13.1@26.921,4.064
NetL15_1: L15.1 R8.2 | length 1.1
  Top Layer w0.2: R8.2@10.104,12.062 11.156,12.062 L15.1@11.159,12.065
NetL16_1: L16.1 R9.2 | length 1.1
  Top Layer w0.2: R9.2@10.104,14.605 L16.1@11.159,14.605
NetL17_1: L17.1 R10.2 | length 1.1
  Top Layer w0.2: R10.2@10.104,17.145 L17.1@11.159,17.145
NetL18_1: L18.1 R11.2 | length 1.1
  Top Layer w0.2: R11.2@10.104,19.685 L18.1@11.159,19.685
NetR8_1: R8.1 X3.1 | length 8.6
  Top Layer w0.2: X3.1@4.064,17.526 6.452,15.138 6.452,13.36 7.75,12.062 R8.1@9.354,12.062
NetR9_1: R9.1 X3.2 | length 8.5
  Top Layer w0.2: X3.2@4.064,20.066 5.512,18.618 5.512,17.018 7.925,14.605 R9.1@9.354,14.605
NetR10_1: R10.1 X3.3 | length 9.2
  Top Layer w0.2: X3.3@4.064,22.606 5.912,20.758 5.912,17.882 6.648,17.145 R10.1@9.354,17.145
NetR11_1: R11.1 X3.4 | length 9.3
  Top Layer w0.2: X3.4@4.064,25.146 6.325,22.885 6.325,19.939 6.579,19.685 R11.1@9.354,19.685
pads on no net: D1.9 D1.10 D1.11

## Polygon pours and split planes (outlines as drawn)
NetC51_1 on Bottom Layer "NONET_L-01_P-001" (solid, pour order 1): 23.063,33.452 23.063,22.352 36.855,22.352 36.855,19.685 37.846,19.685 37.846,22.53 40.919,22.53 40.919,33.452 26.467,33.452
GND on Bottom Layer "NONET_L-01_P-001" (solid, pour order 2): 0,124.939 0,-0.061 151,-0.061 151,124.939
+12V on Bottom Layer "NONET_L-01_P-001" (solid, pour order 0): 43.917,15.951 43.917,7.569 38.227,7.569 38.227,5.867 23.063,5.867 23.063,22.352 36.398,22.352 36.398,15.951 43.002,15.951
GND on Top Solder (solid): 0,0 7,0 151,0 151,125 0,125
GND on Top Layer "NONET_L-01_P-001" (solid, pour order 3): 0,125 0,0 151,0 151,125

## Silkscreen, mask and mechanical layers (free items; w line width, h text height)
Top Overlay:
  lines w0.254: 7.214,25.298 7.823,25.298 9.322,26.797 10.033,26.797
  text "RF_IN" at 7.417,119.507 h1.52
  text "3.6 MHz" at 3.429,109.474 h1.52 r270
  text "7.2 MHz" at 3.429,91.034 h1.52 r270
  text "14.2 MHz" at 3.429,69.418 h1.52 r270
  text "RF_OUT" at 132.156,59.715 h1.52
  text "+12V" at 5.918,54.381 h1.52 r270
  text "28 MHz" at 3.429,47.422 h1.52 r270
  text "RF_LPF_BANK_001_v1" at 109.896,35.55 h1.8
  text "UR4UUZ @Vitech_UA" at 109.896,32.527 h1.8
  text "07.2026" at 109.896,29.711 h1.8
  text "D" at 10.385,27.08 h1.1 r270
  text "C" at 10.385,25.7 h1.1 r270
  text "B" at 10.385,24.319 h1.1 r270
  text "A" at 10.385,22.939 h1.1 r270
Top Solder:
  pour cut-out: 2,123 2,4 ccw(c4,4) 4,2 147.11,2 ccw(c147.11,4.14) 149.25,4.14 149.25,120.447 ccw(c146.697,120.447) 146.697,123
Board:
  the board outline again, w0.254
Title:
  lines w0.1: 198.8,199.4 266.75,199.4
  lines w0.127: -44.879,10.002 -39.799,10.002 ; -44.879,80.487 -39.799,80.487 ; -44.879,150.972 -39.799,150.972 ; 4.397,-60.483 4.397,-55.403 ; 4.397,216.377 4.397,221.457 ; 53.546,-60.483 53.546,-55.403 ; 53.546,216.377 53.546,221.457 ; 102.695,-60.483 102.695,-55.403 ; 102.695,216.377 102.695,221.457 ; 151.971,-60.483 151.971,-55.403 ; 151.971,216.377 151.971,221.457 ; 194.725,-55.375 194.725,-25.375 343.725,-25.375 ; 194.725,-50.375 343.725,-50.375 ; 194.725,-45.375 343.725,-45.375 ; 194.725,-35.375 343.725,-35.375 ; 201.12,-60.483 201.12,-55.403 ; 201.12,216.377 201.12,221.457 ; 209.725,-45.375 209.725,-35.375 ; 250.269,-60.483 250.269,-55.403 ; 250.269,216.377 250.269,221.457 ; 279.725,-55.375 279.725,-45.375 ; 299.545,-60.483 299.545,-55.403 ; 299.545,216.377 299.545,221.457 ; 328.725,-45.375 328.725,-35.375 ; 343.741,10.002 348.821,10.002 ; 343.741,80.487 348.821,80.487 ; 343.741,150.972 348.821,150.972 ; -44.879,-60.483 348.821,-60.483 348.821,221.457 -44.879,221.457 -44.879,-60.483 ; -39.799,-55.403 343.741,-55.403 343.741,216.377 -39.799,216.377 -39.799,-55.403
  text "1" at -20.842,218.028 h1.78
  text "2" at 28.197,218.028 h1.78
  text "3" at 77.456,218.028 h1.78
  text "4" at 126.749,218.028 h1.78
  text "5" at 176.025,218.028 h1.78
  text "6" at 225.047,218.028 h1.78
  text "7" at 274.577,218.028 h1.78
  text "8" at 323.599,218.028 h1.78
  text "NOTES: UNLESS OTHERWISE SPECIFIED." at 200.2,200.45 h2.5
  text "1. MATERIAL:BASE MATERIAL LAMINATED EPOXY GLASS (ANY COLOR)" at 200.35,194.4 h2.5
  text "GRADE NEMA FR-4. ALL SIDES 1 OZ COPPER PER MIL-P-13949." at 206.95,189.9 h2.5
  text "AND IS UL APPROVED MFR SOURCE WITH 1.6 mm +-10 PERCENT" at 206.95,186.2 h2.5
  text "A" at -42.974,184.043 h1.78
  text "A" at 345.646,184.043 h1.78
  text "2. SOLDER PLATE PER QQ-S-571." at 200.35,181.9 h2.5
  text "3. SILKSCREEN IS ABSENT." at 200.35,177.9 h2.5
  text "4. DIMENSIONS IN MILLIMETERS, (...) - FOR REFERENCE," at 200.3,173 h2.5
  text "TOLERANCE ARE: +-0.15; HOLES: +- 0.05." at 207.45,168.95 h2.5
  text "5. LIQUID PHOTO IMAGABLE SOLDERMASK ENTHRONE DSR3241" at 200.35,164.9 h2.5
  text "OR ALTERNATIVE." at 207.45,160.95 h2.5
  text "6.  FOR REF ONLY: THIS BOARD HAS SMD ON BOTH SIDES." at 200.35,156.9 h2.5
  text "7.  THE FINISH OF THE BOARD IS HASL." at 200.2,150.5 h2.5
  text "8. PCB stackup:" at 200.2,144.8 h2.5
  text "B" at -42.974,113.431 h1.78
  text "B" at 345.646,113.431 h1.78
  text "C" at -42.974,42.819 h1.78
  text "C" at 345.646,42.819 h1.78
  text "D" at -42.974,-27.285 h1.78
  text "D" at 345.646,-27.285 h1.78
  text "TITLE:" at 195.7,-27.8 h1.2
  text "SIZE:" at 195.7,-37.55 h1.2
  text "DWG NO:" at 210.7,-37.55 h1.2
  text "REV:" at 330.2,-37.55 h1.2
  text ".Project_Version" at 335.4,-38.7 h2.5
  text "A3" at 201.7,-42.3 h2.5
  text "DATE:" at 195.7,-47.55 h1.2
  text "PCB DESIGNER:" at 281.2,-47.55 h1.2
  text ".PRINT_DATE" at 209.2,-48.8 h2.5
  text "FILE NAME:" at 195.7,-52.55 h1.2
  text "SHEET:" at 280.95,-52.55 h1.2
  text ".PCB_FILE_NAME_NO_PATH" at 209.2,-53.8 h2.5
  text "1 OF 1" at 298.95,-54.05 h2.5
  text "1" at -20.842,-58.832 h1.78
  text "2" at 28.197,-58.832 h1.78
  text "3" at 77.456,-58.832 h1.78
  text "4" at 126.749,-58.832 h1.78
  text "5" at 176.025,-58.832 h1.78
  text "6" at 225.047,-58.832 h1.78
  text "7" at 274.577,-58.832 h1.78
  text "8" at 323.599,-58.832 h1.78

## Text inside footprints (layer, text, board x,y; h text height)
C49: Top Assembly "A" at 10.836,9.825 h0.7 r180; Top Assembly "+" at 12.136,8.825 h0.3 r180
C51: Bottom Assembly "A" at 17.42,29.799 h0.7; Bottom Assembly "+" at 18.72,30.799 h0.3
D2: Bottom Assembly "2" at 35.352,6.671 h0.7; Bottom Assembly "1" at 37.452,6.671 h0.7; Bottom Assembly "3" at 33.002,6.671 h0.7; Bottom Assembly "4" at 35.302,11.121 h0.7
HG1: Top Assembly "A" at 6.756,102.347 h0.3 r270; Top Assembly "K" at 6.756,103.363 h0.3 r270
HG2: Top Assembly "A" at 6.756,80.403 h0.3 r270; Top Assembly "K" at 6.756,81.419 h0.3 r270
HG3: Top Assembly "A" at 6.756,58.458 h0.3 r270; Top Assembly "K" at 6.756,59.474 h0.3 r270
HG4: Top Assembly "A" at 6.756,35.764 h0.3 r270; Top Assembly "K" at 6.756,36.78 h0.3 r270
HG5: Top Assembly "K" at 20.181,5.283 h0.3 r180; Top Assembly "A" at 19.165,5.283 h0.3 r180
K1: Top Assembly "NO" at 12.116,111.636 h0.8; Top Assembly "NC" at 12.116,105.036 h0.8; Top Assembly "COM" at 27.116,111.436 h0.8
K2: Top Assembly "COM" at 122.72,106.02 h0.8 r180; Top Assembly "NC" at 137.72,112.42 h0.8 r180; Top Assembly "NO" at 137.72,105.82 h0.8 r180
K3: Top Assembly "COM" at 27.116,89.492 h0.8; Top Assembly "NC" at 12.116,83.092 h0.8; Top Assembly "NO" at 12.116,89.692 h0.8
K4: Top Assembly "COM" at 122.72,75.524 h0.8 r180; Top Assembly "NC" at 137.72,81.924 h0.8 r180; Top Assembly "NO" at 137.72,75.324 h0.8 r180
K5: Top Assembly "COM" at 27.116,67.548 h0.8; Top Assembly "NC" at 12.116,61.148 h0.8; Top Assembly "NO" at 12.116,67.748 h0.8
K6: Top Assembly "COM" at 122.72,45.044 h0.8 r180; Top Assembly "NC" at 137.72,51.444 h0.8 r180; Top Assembly "NO" at 137.72,44.844 h0.8 r180
K7: Top Assembly "COM" at 27.116,45.603 h0.8; Top Assembly "NC" at 12.116,39.203 h0.8; Top Assembly "NO" at 12.116,45.803 h0.8
K8: Top Assembly "COM" at 122.72,14.945 h0.8 r180; Top Assembly "NC" at 137.72,21.345 h0.8 r180; Top Assembly "NO" at 137.72,14.745 h0.8 r180